# Altium PCB AMPURR.PcbDoc (part 6 of 6)
Units mm, origin at the board's own origin, x right, y up, seen from the top; angles counter-clockwise.
Board outline 100 x 100 mm, 4 copper layers (Top Layer, GND, VDD, Bottom Layer), stack 1.586 mm thick; 522 components, 281 nets, 1527 pads, 2431 vias.
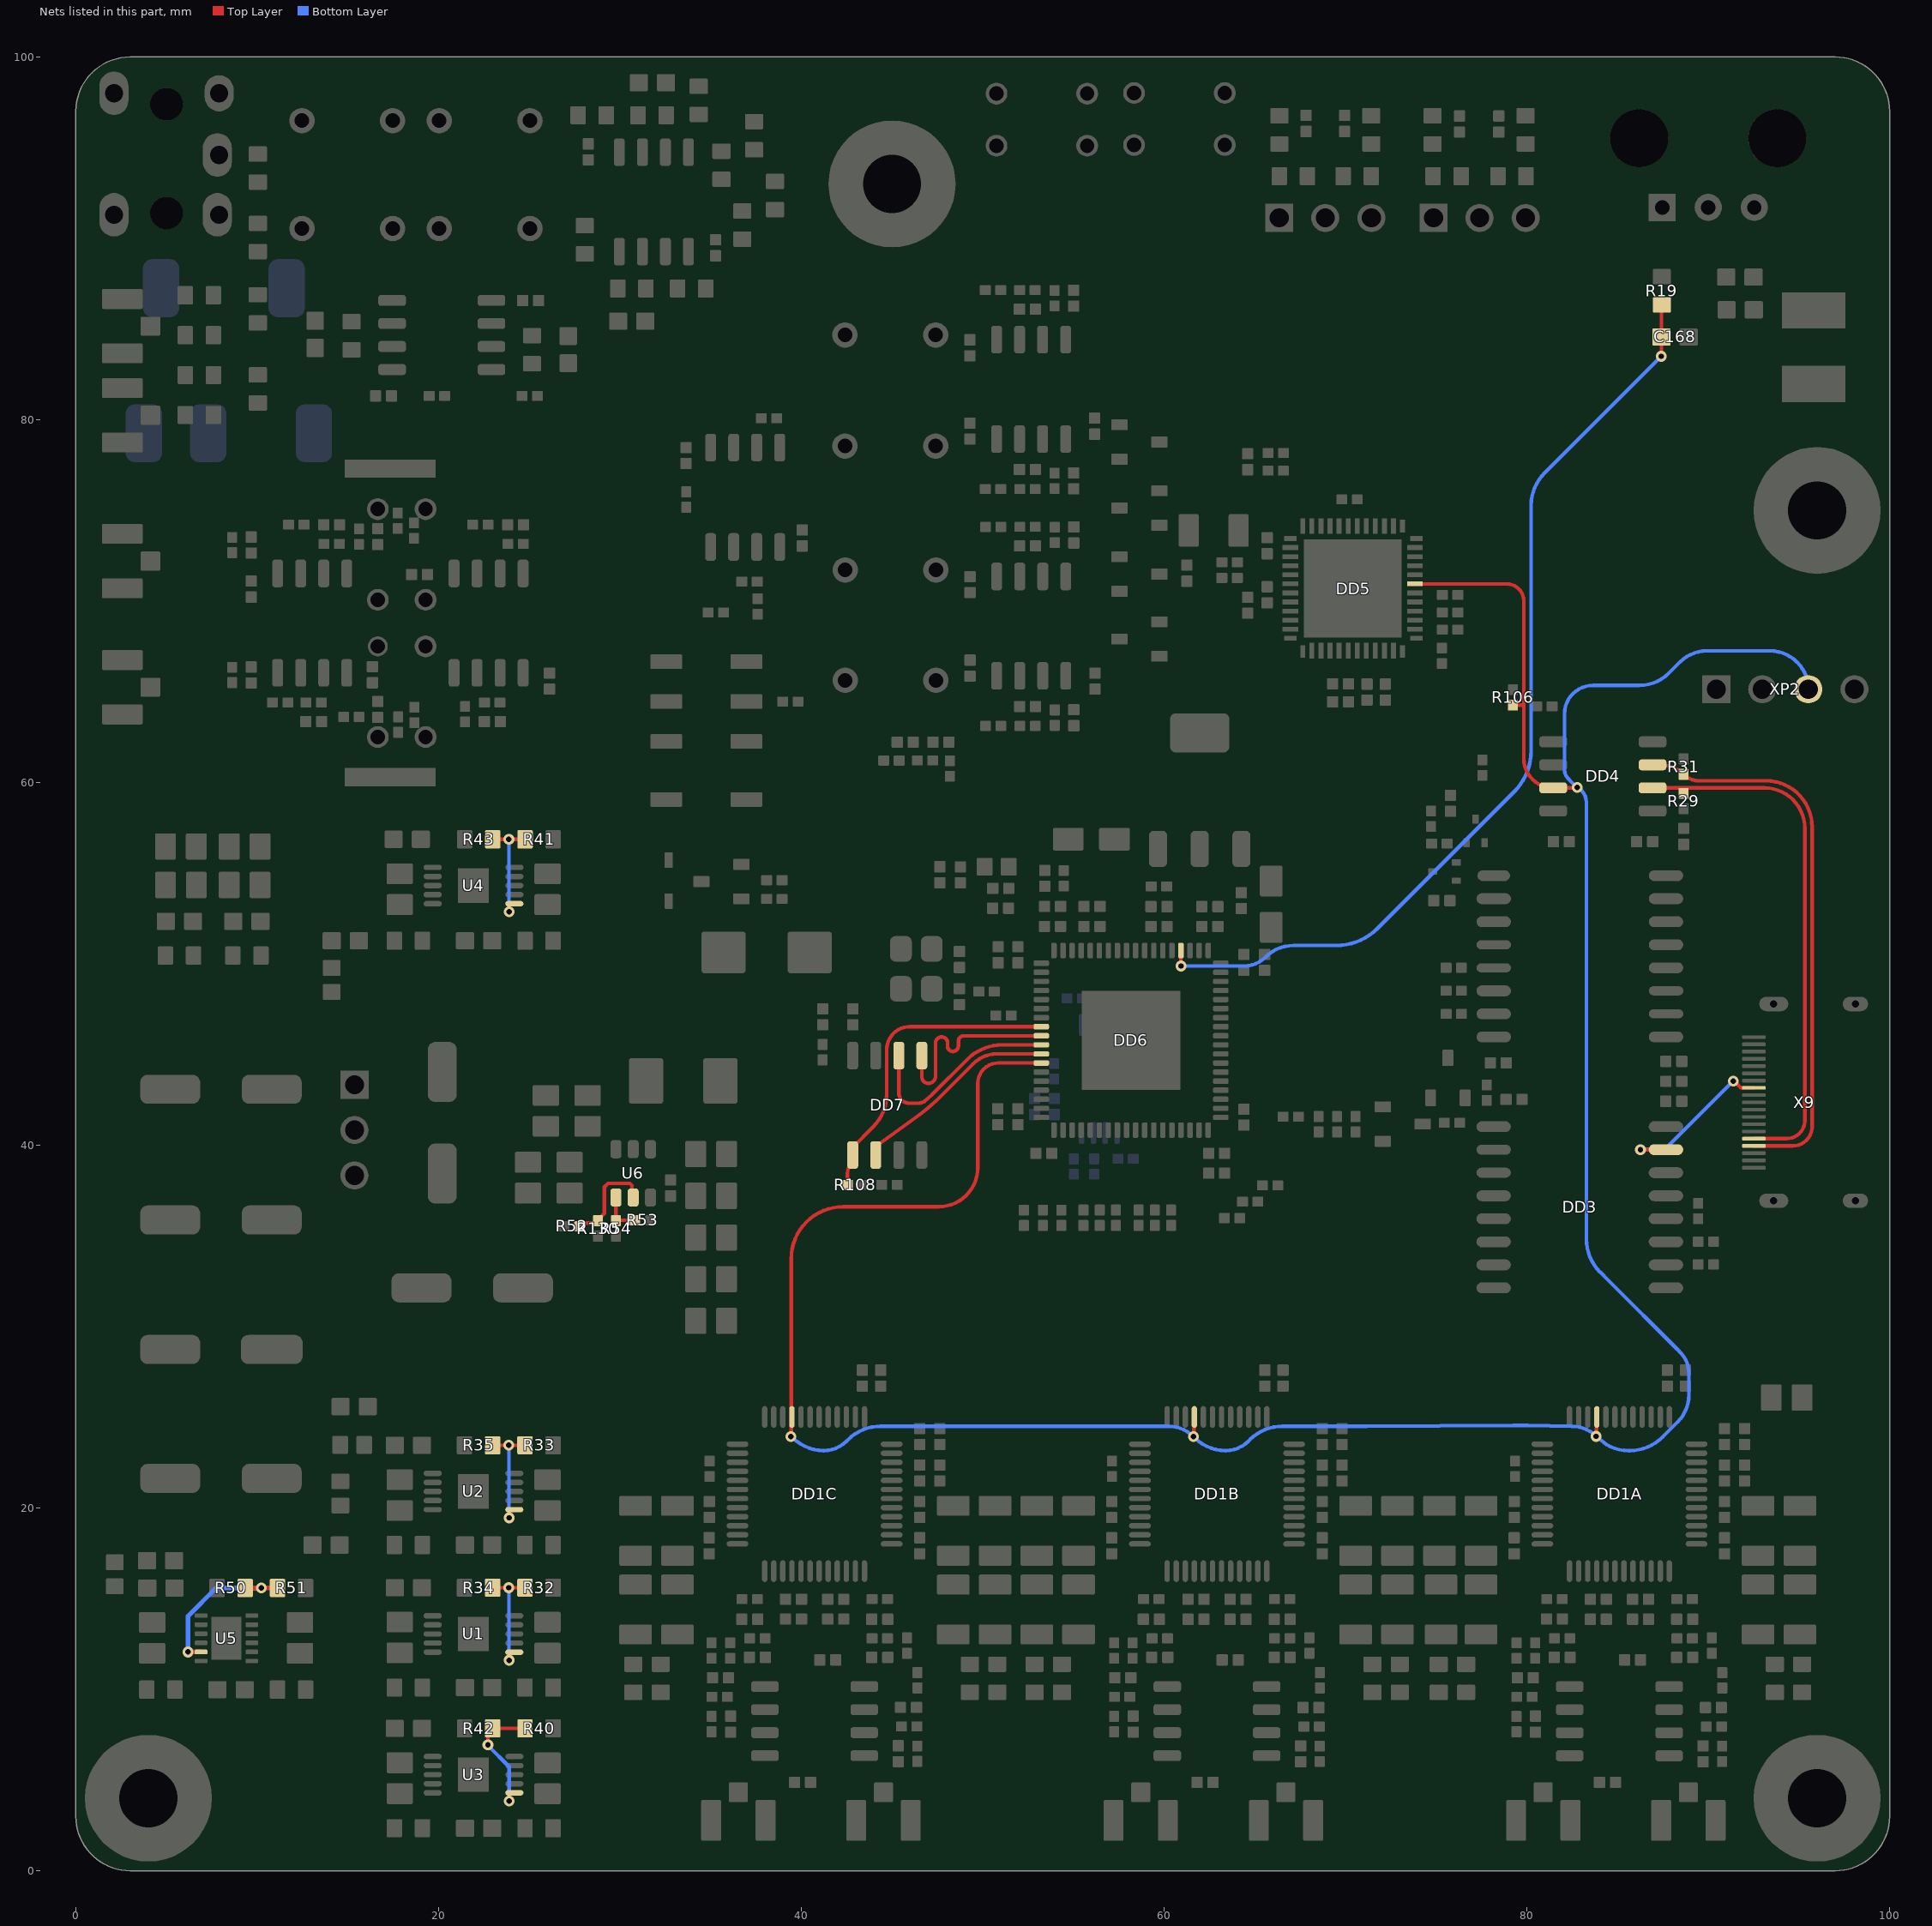
[diagram p7: the nets of this part, all layers, seen from the top]

## Via types
v1: diameter 0.6, hole 0.3, Top Layer to Bottom Layer, tented both sides, 2431 vias

## Nets (pads, with @x,y where several pads share a name; then routed paths per layer and width w, separated by ;. In a path a pad name is that pad's centre, name@x,y a point inside that pad or via, vN(x,y) a via of type N, cw(c..) or ccw(c..) an arc to the next point about the centre after c; other vN are vias at no path point) (continued)
SCL_ISO: DD4.3 R31.2 X9.16 | length 30.4
  Top Layer w0.2: DD4.3@87.38,60.972 cw(c87.38,59.183) R31.2@88.645,60.448 ccw(c89.505,61.308) 89.505,60.092 93.187,60.092 cw(c93.187,57.552) 95.727,57.552 95.727,41.021 cw(c94.668,41.021) 94.668,39.962 94.561,39.961 X9.16@92.496,39.961
SDA: DD1A.9 DD1B.9 DD1C.9 DD4.7 DD5.31 DD6.30 R106.2 XP2.3 | length 162.5
  Top Layer w0.2: v1(39.418,23.935) ccw(c39.367,23.987) 39.44,23.987 39.44,33.74 cw(c42.308,33.74) 42.308,36.609 47.571,36.609 ccw(c47.571,38.769) 49.497,37.79 ccw(c47.509,38.783) 49.731,38.783 49.731,43.409 cw(c50.856,43.409) 50.856,44.534 DD6.30@53.229,44.534 ; v1(61.619,23.936) 61.668,24.569 DD1B.9@61.668,25.019 ; DD5.31@73.833,70.95 75.074,70.95 75.076,70.948 77.239,70.948 78.896,70.948 cw(c78.896,70.016) 79.828,70.016 79.828,64.267 ; R106.2@79.235,64.264 79.826,64.264 79.828,64.267 ; v1(82.772,59.726) cw(c82.716,59.782) 82.716,59.703 DD4.7@81.455,59.703 cw(c81.455,61.329) 79.828,61.329 79.828,64.267 ; v1(83.821,23.951) 83.856,24.569 DD1A.9@83.856,25.019
  Bottom Layer w0.2: v1(39.418,23.935) 39.461,23.935 39.527,23.87 ccw(c41.236,25.579) 41.235,23.162 ; 41.236,23.162 ccw(c41.236,24.937) 42.492,23.682 42.574,23.765 cw(c44.37,21.969) 44.37,24.509 60.237,24.509 cw(c60.237,22.553) v1(61.619,23.936) ; v1@61.684,23.87 ccw(c63.394,25.579) 63.393,23.162 ; 63.394,23.162 ccw(c63.394,24.937) 64.649,23.682 64.733,23.765 cw(c66.529,21.969) 66.529,24.509 71.169,24.509 79.252,24.547 80.047,24.547 82.473,24.509 cw(c82.473,22.603) v1(83.821,23.951) 84.368,23.507 ccw(c85.612,25.579) 85.611,23.162 85.682,23.162 ccw(c85.682,25.702) 87.478,23.906 88.303,24.731 ccw(c86.777,26.26) 88.937,26.26 88.937,27.418 ccw(c87.308,27.418) 88.657,28.331 88.5,28.529 ccw(c87.308,27.418) 88.461,28.569 cw(c88.728,28.839) 88.438,28.595 ; v1(82.772,59.726) 82.366,60.123 cw(c82.772,60.538) 82.341,60.15 82.279,60.218 ccw(c82.131,60.084) 82.273,60.225 cw(c82.74,60.693) 82.079,60.693 82.079,63.784 cw(c83.647,63.784) 83.647,65.352 86.207,65.352 ccw(c86.207,67.647) 87.83,66.024 88.446,66.64 cw(c89.932,65.154) 89.932,67.255 93.406,67.255 cw(c93.406,65.14) XP2.3@95.521,65.14 ; v1@82.923,59.668 cw(c81.85,58.595) 83.213,59.261 ; 83.213,59.26 cw(c83.033,59.173) 83.227,59.225 cw(c81.378,58.739) 83.289,58.744 83.289,34.808 ccw(c85.829,34.808) 84.033,33.012 84.514,32.531 88.309,28.736 cw(c86.777,27.213) 88.436,28.597 ccw(c88.728,28.839) 88.437,28.595
SDA_ISO: DD4.2 R29.2 X9.15 | length 29.2
  Top Layer w0.2: DD4.2@86.935,59.702 86.938,59.706 93.091,59.706 cw(c93.091,57.47) 95.327,57.47 95.327,41.366 cw(c94.324,41.366) 94.324,40.363 X9.15@92.517,40.363
SPDIFIN: C168.2 DD6.4 R19.2 | length 52.9
  Top Layer w0.2: v1(60.927,49.879) 60.927,50.732 DD6.4@60.929,50.734 ; v1(87.409,83.5) 87.42,83.5 C168.2@87.42,84.562 87.42,86.337 R19.2@87.442,86.337
  Bottom Layer w0.2: v1(60.927,49.879) 64.394,49.879 ccw(c64.394,51.587) 65.602,50.379 cw(c67.131,48.85) 67.131,51.013 69.496,51.013 ccw(c69.496,54.216) 71.761,51.951 79.301,59.491 ccw(c77.036,61.756) 80.239,61.756 80.239,75.277 cw(c82.779,75.277) 80.983,77.074 v1(87.409,83.5)
SPI_MISO_M: DD6.29 DD7.2 | length 10.8
  Top Layer w0.2: DD7.2@44.241,40.025 46.556,41.724 46.996,42.064 ; 46.994,42.065 47.463,42.484 49.473,44.494 cw(c50.775,43.192) 50.777,45.034 ; 50.778,45.034 DD6.29@53.229,45.034
SPI_MOSI_M: DD6.27 DD7.5 | length 11.4
  Top Layer w0.2: DD7.5@46.643,44.943 46.643,43.772 ccw(c47.007,43.772) 47.007,43.408 ccw(c47.007,43.8) 47.399,43.8 47.399,45.632 cw(c47.738,45.632) 47.738,45.97 cw(c47.738,45.646) 48.062,45.646 48.062,45.458 ccw(c48.35,45.458) 48.35,45.17 ccw(c48.35,45.48) 48.659,45.48 48.659,45.735 cw(c48.958,45.735) 48.958,46.034 DD6.27@53.229,46.034
SPI_SCLK_M: DD6.28 DD7.6 | length 11.4
  Top Layer w0.2: 45.373,43.029 45.373,42.882 ccw(c45.934,42.882) 45.934,42.321 46.441,42.321 ccw(c46.441,43.03) 46.746,42.391 ccw(c46.659,42.571) 46.793,42.422 47.184,42.771 ccw(c47.05,42.92) 47.191,42.778 49.19,44.777 cw(c50.775,43.192) 49.788,45.205 49.925,45.272 cw(c51.048,42.994) 51.048,45.534 DD6.28@53.229,45.534 ; 45.373,43.03 DD7.6@45.373,44.943
SPI_SS_M: DD6.26 DD7.1 R108.2 | length 16.9
  Top Layer w0.2: R108.2@42.539,37.822 42.539,38.446 cw(c43.24,38.446) DD7.1@42.744,38.942 ; DD7.1@42.833,39.463 42.833,39.888 43.961,41.016 ccw(c42.165,42.812) 44.705,42.812 44.705,45.251 cw(c46.005,45.251) 45.085,46.169 ; 45.086,46.17 cw(c45.964,45.291) 45.964,46.534 DD6.26@53.229,46.534
Vfb=0.595V: R53.1 R54.1 U6.4 | length 2.4
  Top Layer w0.2: U6.4@29.78,37.224 29.78,35.866 R53.1@30.78,35.866
xCLIPPING: DD3.15 X9.8 | length 9.4
  Top Layer w0.2: v1@86.264,39.754 DD3.15@87.671,39.754 ; v1(91.38,43.538) 91.593,43.37 91.779,43.184 91.819,43.182 X9.8@92.517,43.163
  Bottom Layer w0.2: v1(86.264,39.752) 87.594,39.752 v1(91.38,43.538)
~2V: R52.1 R130.2 U6.5 | length 5.4
  Top Layer w0.2: R52.1@27.761,35.533 27.934,35.706 28.655,35.706 R130.2@28.786,35.837 28.961,36.012 28.961,36.065 29.137,36.24 29.137,37.693 29.343,37.899 30.539,37.899 30.656,37.782 30.656,37.298 U6.5@30.73,37.224
~3V: R33.1 R35.2 U2.6 | length 6.5
  Top Layer w0.2: R35.2@22.98,23.458 v1(23.872,23.458) R33.1@24.763,23.458 ; v1(23.886,19.46) 23.905,19.48 23.905,19.862 24.128,19.862 U2.6@24.174,19.908
  Bottom Layer w0.2: v1(23.872,23.458) 23.879,23.451 23.879,19.467 v1(23.886,19.46)
~4V6: R32.1 R34.2 U1.6 | length 6.5
  Top Layer w0.2: R34.2@22.98,15.602 v1(23.872,15.602) R32.1@24.763,15.602 ; v1(23.886,11.605) 23.905,11.624 23.905,12.006 24.128,12.006 U1.6@24.174,12.052
  Bottom Layer w0.2: v1(23.872,15.602) 23.879,15.595 23.879,11.612 v1(23.886,11.605)
~4V6_: R41.1 R43.2 U4.6 | length 6.5
  Top Layer w0.2: R43.2@22.982,56.868 v1(23.873,56.868) R41.1@24.765,56.868 ; v1(23.888,52.871) 23.907,52.89 23.907,53.272 24.13,53.272 U4.6@24.176,53.318
  Bottom Layer w0.2: v1(23.873,56.868) 23.881,56.861 23.881,52.878 v1(23.888,52.871)
~+10V: R40.2 R42.1 U3.6 | length 7.1
  Top Layer w0.2: v1@22.722,6.897 22.722,7.585 R42.1@22.982,7.845 R40.2@24.765,7.845 ; v1(23.888,3.848) 23.907,3.867 23.907,4.249 24.13,4.249 U3.6@24.176,4.295 U3.6@24.148,4.267
  Bottom Layer w0.2: v1@22.722,6.897 23.888,5.731 v1(23.888,3.848)
  other v1: 22.722,6.934
~-10V: R50.2 R51.1 U5.5 | length 9.2
  Top Layer w0.25: v1(6.179,12.062) 6.18,12.064 U5.5@6.902,12.064 ; R50.2@9.333,15.59 R51.1@11.116,15.59
  Bottom Layer w0.25: v1(6.179,12.062) 6.179,14.029 7.74,15.59 v1(10.224,15.59)
pads on no net: DA2.MH DD1A.10 DD1A.11 DD1B.10 DD1B.11 DD1C.10 DD1C.11 DD2.5 DD2.12 DD3.3 DD3.4 DD3.13 DD3.14 DD5.29 DD6.5 DD6.8 DD6.9 DD6.10 DD6.11 DD6.12 DD6.13 DD6.46 DD6.63 DD6.64 U1.4 U2.4 U3.4 U4.4 U5.4 U5.7 X1.5 X3.0

## Polygon pours and split planes (outlines as drawn)
GND on Top Layer "NONET_L-01_P-001" (solid, remove dead copper, pour order 99): 0,-0.023 0,100 100,100 100,63.701 85.32,63.701 85.32,31.421 90.639,31.421 92.771,29.289 100,29.289 100,0.113
GND_ISO on Top Layer "NONET_L-01_P-001" (solid, remove dead copper, pour order 63): 85.544,63.52 100.005,63.52 100.005,29.388 92.824,29.388 90.616,31.595 86.492,31.595 85.544,32.544
GND on VDD "NONET_L-01_P-001" (solid, remove dead copper, pour order 100): 0,-0.023 0,100 100,100 100,63.701 85.32,63.701 85.32,31.421 90.639,31.421 92.771,29.289 100,29.289 100,0.113
+5VAK on VDD "NONET_L-01_P-001" (solid, remove dead copper, pour order 98): 64.349,75.183 64.349,70.285 60.157,66.093 59.437,66.093 59.438,68.962 59.437,75.183
+3.3VD on VDD "NONET_L-01_P-001" (solid, remove dead copper, pour order 89): 39.613,51.225 35.27,51.225 34.667,50.622 34.667,24.282 92.326,24.282 92.326,26.97 37.576,26.97 37.576,45.416 48.696,56.536 75.873,56.536 80.585,56.536 80.585,64.284 80.891,64.59 90.932,64.59 90.932,65.913 79.062,65.913 78.309,65.161 78.309,62.142 74.401,58.873 67.829,58.873 67.829,63.496 69.579,63.496 69.579,64.693 65.844,64.693 65.844,59.268 56.506,59.268 55.134,59.268 54.646,58.78 47.179,58.78
+5VA on VDD "NONET_L-01_P-001" (solid, remove dead copper, pour order 78): 32.749,11.251 29.946,11.251 29.684,11.513 29.684,12.581 28.044,14.221 26.99,13.234 28.328,11.895 28.328,9.57 29.653,8.245 33.358,8.245 36.627,11.513 43.148,11.513 43.148,14.667 36.164,14.667
+3.3VA on VDD "NONET_L-01_P-001" (solid, remove dead copper, pour order 83): 27.243,22.157 27.098,21.017 28.786,19.329 93.012,19.329 93.012,21.802 89.133,21.802 88.55,21.218 88.003,21.218 87.727,21.494 83.522,21.494 83.123,21.893 66.932,21.893 66.257,21.218 65.88,21.218 65.604,21.494 61.508,21.494 61.109,21.893 44.801,21.893 44.126,21.218 43.659,21.218 43.367,21.51 39.387,21.51 38.74,22.157
+5VA on VDD "NONET_L-01_P-001" (solid, remove dead copper, pour order 72): 93.481,11.135 96.326,11.135 96.326,8.29 92.403,8.29 89.176,11.517 82.682,11.517 82.682,14.709 89.907,14.709
+5VA on VDD "NONET_L-01_P-001" (solid, remove dead copper, pour order 75): 71.235,11.157 74.134,11.157 74.134,8.258 70.395,8.258 67.106,11.547 60.49,11.547 60.49,14.666 67.726,14.666
+5VA on VDD "NONET_L-01_P-001" (solid, remove dead copper, pour order 73): 77.055,11.155 73.884,11.155 73.884,8.252 77.768,8.252 81.033,11.516 87.528,11.516 87.528,14.709 80.609,14.709
+5VA on VDD "NONET_L-01_P-001" (solid, remove dead copper, pour order 74): 54.843,11.157 51.692,11.157 51.692,8.249 55.551,8.249 58.854,11.552 65.336,11.552 65.336,14.674 58.359,14.674
+5VA on VDD "NONET_L-01_P-001" (solid, remove dead copper, pour order 76): 49.037,11.157 51.946,11.157 51.946,8.249 48.23,8.249 44.958,11.52 38.302,11.52 38.302,14.667 45.528,14.667
GND_ISO on VDD "NONET_L-01_P-001" (solid, remove dead copper, pour order 38): 85.552,63.605 100.005,63.605 100.005,29.388 92.824,29.388 90.61,31.602 86.486,31.602 85.552,32.536
MVCC on VDD "NONET_L-01_P-001" (solid, remove dead copper, pour order 15): 64.562,54.906 64.562,53.916 62.629,51.983 62.629,50.368 54.007,50.368 51.776,48.137 51.776,47.129 52.892,46.014 52.892,40.999 53.416,40.476 53.416,39.988 51.722,39.988 51.722,45.086 50.488,46.32 50.488,48.754 51.341,49.607 51.341,54.906
GND on Bottom Layer "NONET_L-01_P-001" (solid, remove dead copper, pour order 70): 0,-0.023 0,100 99.831,100 99.918,63.755 85.418,63.755 85.418,32.488 86.485,31.421 90.639,31.421 92.771,29.289 100,29.289 100,0.113
GND_ISO on Bottom Layer "NONET_L-01_P-001" (solid, remove dead copper, pour order 37): 85.576,63.565 100.005,63.565 100.005,29.388 92.824,29.388 90.613,31.598 86.538,31.598 85.576,32.56
GND on GND "NONET_L-01_P-001" (solid, remove dead copper, pour order 68): 0,-0.023 0,100 99.831,100 99.918,63.79 85.418,63.79 85.418,32.439 86.423,31.434 90.627,31.434 92.771,29.289 100,29.289 100,0.113
GND_ISO on GND "NONET_L-01_P-001" (solid, remove dead copper, pour order 59): 85.544,63.599 100.005,63.599 100.005,29.388 92.824,29.388 90.612,31.6 86.454,31.6 85.544,32.509

## Keep-outs
Top Layer:
  circle w0.254: c86.19,95.516 r2.091
  circle w0.254: c93.81,95.516 r2.091
  lines w0.1: 48.824,91.652 59.829,91.652 62.886,88.595 82.388,88.595 82.388,99.521
GND:
  circle w0.254: c93.81,95.516 r2.091
  circle w0.254: c86.2,95.427 r2.091
  circle w0.254: c93.82,95.427 r2.091
  lines w0.1: 48.824,91.652 59.829,91.652 62.886,88.595 82.388,88.595 82.388,99.521
VDD:
  circle w0.254: c86.19,95.516 r2.091
  circle w0.254: c93.81,95.516 r2.091
  lines w0.1: 48.824,91.652 59.829,91.652 62.886,88.595 82.388,88.595 82.388,99.521
Bottom Layer:
  circle w0.254: c93.81,95.516 r2.091
  circle w0.254: c86.19,95.516 r2.091
  lines w0.1: 48.824,91.652 59.829,91.652 62.886,88.595 82.388,88.595 82.388,99.521

## Other copper
Top Layer:
  drawing of 205 lines, arcs and shapes, not listed
GND:
  region net -12V0: 11.723,35.884 11.732,35.875 cw(c11.442,35.875) 11.442,35.585 10.793,35.585 cw(c10.793,35.875) 10.503,35.875 cw(c10.802,35.875) 10.802,36.174 11.45,36.174 cw(c11.442,35.884) 11.732,35.875
  region net -12VOP: 13.985,14.286 cw(c13.985,13.983) 14.287,13.983 14.287,13.393 cw(c13.974,13.393) 13.974,13.08 13.415,13.08 cw(c13.415,13.403) 13.091,13.403 13.091,13.978 cw(c13.399,13.978) 13.399,14.286
  region net NetC67_1: 7.795,13.613 8.805,13.613 cw(c8.805,13.312) 9.106,13.312 9.106,12.307 cw(c8.808,12.307) 8.808,12.009 7.797,12.009 cw(c7.797,12.294) 7.512,12.294 7.512,13.333 cw(c7.79,13.333) 7.79,13.611
  region net +3.3VA: 27.838,22.157 cw(c27.838,21.855) 28.141,21.855 28.141,21.264 cw(c27.828,21.264) 27.828,20.951 27.268,20.951 cw(c27.268,21.275) 26.945,21.275 26.945,21.85 cw(c27.253,21.85) 27.253,22.157
  region net +5VA: 27.833,14.302 cw(c27.833,13.999) 28.136,13.999 28.136,13.408 cw(c27.823,13.408) 27.823,13.095 27.264,13.095 cw(c27.264,13.419) 26.94,13.419 26.94,13.994 cw(c27.248,13.994) 27.248,14.302
  region net +5VAK: 63.349,74.79 63.658,74.788 cw(c63.658,74.491) 63.955,74.491 63.955,73.31 cw(c63.646,73.31) 63.646,73.001 63.353,73.001 cw(c63.353,73.31) 63.044,73.31 63.044,74.491 cw(c63.341,74.491) 63.341,74.788
  region net -12VOP: 8.823,49.67 cw(c8.619,49.461) 8.828,49.256 8.218,48.646 cw(c8.002,48.855) 7.793,48.639 cw(c8.009,48.855) 7.793,49.071 8.391,49.67 cw(c8.607,49.454)
  region net +12VOP: 6.741,49.457 cw(c6.449,49.454) 6.452,49.161 5.813,49.161 cw(c5.813,49.457) 5.517,49.457 cw(c5.818,49.461) 5.814,49.762 6.436,49.762 cw(c6.436,49.457)
  region net +12VOPF: 4.969,58.547 cw(c4.973,58.254) 5.265,58.257 5.265,57.511 cw(c4.979,57.511) 4.979,57.224 cw(c4.979,57.539) 4.664,57.539 4.664,58.241 cw(c4.969,58.241)
  region net -12VOPF: 10.198,59.082 ccw(c10.198,58.784) 9.9,58.784 9.9,58.776 ccw(c10.198,58.776) 10.198,58.478 11.033,58.478 ccw(c11.033,58.784) 11.339,58.784 ccw(c11.041,58.785) 11.041,59.082
  region net +5VAK: 27.868,55.548 cw(c27.868,55.266) 28.15,55.266 28.15,54.636 cw(c27.866,54.636) 27.866,54.351 27.258,54.351 cw(c27.258,54.664) 26.945,54.664 26.945,55.249 cw(c27.245,55.249) 27.245,55.548
  region net +3.3VD: 48.318,57.748 cw(c48.318,57.445) 48.621,57.445 48.621,56.855 cw(c48.308,56.855) 48.308,56.541 47.748,56.541 cw(c47.748,56.865) 47.425,56.865 47.425,57.44 cw(c47.733,57.44) 47.733,57.748
  region net +3.3VD: 36.02,51.224 cw(c36.02,50.916) 36.328,50.916 36.328,50.309 cw(c36.037,50.309) 36.037,50.017 35.423,50.017 cw(c35.423,50.314) 35.127,50.314 35.127,50.927 cw(c35.423,50.927) 35.423,51.224
  region net +3.3VD: 92.322,25.79 92.322,26.389 ccw(c92.017,26.389) 92.017,26.694 ccw(c92.017,26.394) 91.717,26.394 91.717,25.799 ccw(c92.015,25.799) 92.015,25.501 92.036,25.501 ccw(c92.036,25.786) 92.32,25.786
  region net +3.3VD: 36.185,29.551 cw(c36.185,29.248) 36.488,29.248 36.488,28.657 cw(c36.175,28.657) 36.175,28.344 35.615,28.344 cw(c35.615,28.668) 35.292,28.668 35.292,29.243 cw(c35.6,29.243) 35.6,29.551
  region net NetC23C_2: 32.522,14.701 33.804,14.701 cw(c33.804,14.399) 34.105,14.399 cw(c33.804,14.399) 33.804,14.098 32.539,14.097 cw(c32.539,14.406) 32.23,14.406 32.23,14.409 cw(c32.53,14.4) 32.539,14.701
  region net NetC23C_2: 32.522,19.046 33.804,19.046 cw(c33.804,18.744) 34.105,18.744 cw(c33.804,18.744) 33.804,18.443 32.539,18.442 cw(c32.539,18.751) 32.23,18.751 32.23,18.754 cw(c32.53,18.745) 32.539,19.046
  region net NetC3C_2: 47.723,14.701 49.005,14.701 cw(c49.005,14.399) 49.307,14.399 cw(c49.005,14.399) 49.005,14.098 47.74,14.097 cw(c47.74,14.406) 47.431,14.406 47.431,14.409 cw(c47.732,14.4) 47.74,14.701
  region net NetC3C_2: 47.727,19.046 49.009,19.046 cw(c49.009,18.744) 49.31,18.744 cw(c49.009,18.744) 49.009,18.443 47.744,18.442 cw(c47.744,18.751) 47.435,18.751 47.435,18.754 cw(c47.735,18.745) 47.744,19.046
  region net NetC26C_1: 30.414,12.294 31.064,12.294 cw(c31.064,12) 31.358,12 cw(c31.057,11.992) 31.064,11.691 30.431,11.691 cw(c30.431,12) 30.122,12 30.122,12.002 cw(c30.422,11.994) 30.431,12.294
  region net NetC26C_1: 30.215,14.701 31.497,14.701 cw(c31.497,14.399) 31.798,14.399 cw(c31.497,14.399) 31.497,14.098 30.232,14.097 cw(c30.232,14.406) 29.923,14.406 29.923,14.409 cw(c30.223,14.4) 30.232,14.701
  region net NetC26C_1: 30.215,19.046 31.497,19.046 cw(c31.497,18.744) 31.798,18.744 cw(c31.497,18.744) 31.497,18.443 30.232,18.442 cw(c30.232,18.751) 29.923,18.751 29.923,18.754 cw(c30.223,18.745) 30.232,19.046
  region net NetC3C_1: 50.029,14.701 51.311,14.701 cw(c51.311,14.399) 51.613,14.399 cw(c51.311,14.399) 51.311,14.098 50.046,14.097 cw(c50.046,14.406) 49.737,14.406 49.737,14.409 cw(c50.038,14.4) 50.046,14.701
  region net NetC3C_1: 50.475,12.294 51.125,12.294 cw(c51.125,12) 51.419,12 cw(c51.118,11.992) 51.125,11.691 50.492,11.691 cw(c50.492,12) 50.183,12 50.183,12.002 cw(c50.483,11.994) 50.492,12.294
  region net NetC3C_1: 50.029,19.046 51.311,19.046 cw(c51.311,18.744) 51.613,18.744 cw(c51.311,18.744) 51.311,18.443 50.046,18.442 cw(c50.046,18.751) 49.737,18.751 49.737,18.754 cw(c50.038,18.745) 50.046,19.046
  region net NetC3C_1: 50.029,19.046 51.311,19.046 cw(c51.311,18.744) 51.613,18.744 cw(c51.311,18.744) 51.311,18.443 50.046,18.442 cw(c50.046,18.751) 49.737,18.751 49.737,18.754 cw(c50.038,18.745) 50.046,19.046
  region net MVCC: 52.109,54.06 52.736,54.061 cw(c52.732,53.76) 53.032,53.756 53.032,53.135 cw(c52.736,53.135) 52.736,52.838 52.109,52.838 cw(c52.109,53.136) 51.811,53.136 51.811,53.762 cw(c52.108,53.762) 52.108,54.059
  region net MVCC: 63.607,54.889 64.257,54.889 cw(c64.257,54.595) 64.551,54.595 cw(c64.25,54.587) 64.257,54.286 63.624,54.286 cw(c63.624,54.595) 63.315,54.595 63.315,54.598 cw(c63.615,54.589) 63.624,54.889
  region net +12VOP: 27.834,6.545 cw(c27.834,6.242) 28.137,6.242 28.137,5.652 cw(c27.824,5.652) 27.824,5.338 27.265,5.338 cw(c27.265,5.662) 26.941,5.662 26.941,6.237 cw(c27.249,6.237) 27.249,6.545
  region net NetC3A_1: 94.405,19.046 95.687,19.046 cw(c95.687,18.744) 95.989,18.744 cw(c95.687,18.744) 95.687,18.443 94.422,18.442 cw(c94.422,18.751) 94.113,18.751 94.113,18.754 cw(c94.414,18.745) 94.422,19.046
  region net NetC3A_2: 92.103,19.046 93.385,19.046 cw(c93.385,18.744) 93.686,18.744 cw(c93.385,18.744) 93.385,18.443 92.12,18.442 cw(c92.12,18.751) 91.811,18.751 91.811,18.754 cw(c92.111,18.745) 92.12,19.046
  region net NetC3A_1: 94.405,14.701 95.687,14.701 cw(c95.687,14.399) 95.989,14.399 cw(c95.687,14.399) 95.687,14.098 94.422,14.097 cw(c94.422,14.406) 94.113,14.406 94.113,14.409 cw(c94.414,14.4) 94.422,14.701
  region net NetC3A_2: 92.099,14.701 93.381,14.701 cw(c93.381,14.399) 93.683,14.399 cw(c93.381,14.399) 93.381,14.098 92.116,14.097 cw(c92.116,14.406) 91.807,14.406 91.807,14.409 cw(c92.108,14.4) 92.116,14.701
  region net NetC3A_1: 94.851,12.294 95.501,12.294 cw(c95.501,12) 95.795,12 cw(c95.494,11.992) 95.501,11.691 94.868,11.691 cw(c94.868,12) 94.559,12 94.559,12.002 cw(c94.859,11.994) 94.868,12.294
  region net NetC23A_2: 76.827,14.701 78.109,14.701 cw(c78.109,14.399) 78.41,14.399 cw(c78.109,14.399) 78.109,14.098 76.844,14.097 cw(c76.844,14.406) 76.535,14.406 76.535,14.409 cw(c76.835,14.4) 76.844,14.701
  region net NetC23A_2: 76.827,19.046 78.109,19.046 cw(c78.109,18.744) 78.41,18.744 cw(c78.109,18.744) 78.109,18.443 76.844,18.442 cw(c76.844,18.751) 76.535,18.751 76.535,18.754 cw(c76.835,18.745) 76.844,19.046
  region net NetC26A_1: 74.534,19.046 75.816,19.046 cw(c75.816,18.744) 76.117,18.744 cw(c75.816,18.744) 75.816,18.443 74.551,18.442 cw(c74.551,18.751) 74.242,18.751 74.242,18.754 cw(c74.542,18.745) 74.551,19.046
  region net NetC26A_1: 74.534,14.701 75.816,14.701 cw(c75.816,14.399) 76.117,14.399 cw(c75.816,14.399) 75.816,14.098 74.551,14.097 cw(c74.551,14.406) 74.242,14.406 74.242,14.409 cw(c74.542,14.4) 74.551,14.701
  region net NetC3B_1: 72.217,14.701 73.499,14.701 cw(c73.499,14.399) 73.801,14.399 cw(c73.499,14.399) 73.499,14.098 72.234,14.097 cw(c72.234,14.406) 71.925,14.406 71.925,14.409 cw(c72.226,14.4) 72.234,14.701
  region net NetC3B_1: 72.217,19.046 73.499,19.046 cw(c73.499,18.744) 73.801,18.744 cw(c73.499,18.744) 73.499,18.443 72.234,18.442 cw(c72.234,18.751) 71.925,18.751 71.925,18.754 cw(c72.226,18.745) 72.234,19.046
  region net NetC3B_2: 69.915,19.046 71.197,19.046 cw(c71.197,18.744) 71.498,18.744 cw(c71.197,18.744) 71.197,18.443 69.932,18.442 cw(c69.932,18.751) 69.623,18.751 69.623,18.754 cw(c69.923,18.745) 69.932,19.046
  region net NetC3B_2: 69.911,14.701 71.193,14.701 cw(c71.193,14.399) 71.495,14.399 cw(c71.193,14.399) 71.193,14.098 69.928,14.097 cw(c69.928,14.406) 69.619,14.406 69.619,14.409 cw(c69.92,14.4) 69.928,14.701
  region net NetC3B_1: 72.663,12.294 73.313,12.294 cw(c73.313,12) 73.607,12 cw(c73.306,11.992) 73.313,11.691 72.68,11.691 cw(c72.68,12) 72.371,12 72.371,12.002 cw(c72.671,11.994) 72.68,12.294
  region net NetC26A_1: 74.79,12.294 75.44,12.294 cw(c75.44,12) 75.734,12 cw(c75.433,11.992) 75.44,11.691 74.807,11.691 cw(c74.807,12) 74.498,12 74.498,12.002 cw(c74.799,11.994) 74.807,12.294
  region net NetC26B_1: 52.342,19.046 53.625,19.046 cw(c53.625,18.744) 53.926,18.744 cw(c53.625,18.744) 53.625,18.443 52.36,18.442 cw(c52.36,18.751) 52.051,18.751 52.051,18.754 cw(c52.351,18.745) 52.36,19.046
  region net NetC23B_2: 54.645,19.046 55.927,19.046 cw(c55.927,18.744) 56.228,18.744 cw(c55.927,18.744) 55.927,18.443 54.662,18.442 cw(c54.662,18.751) 54.353,18.751 54.353,18.754 cw(c54.653,18.745) 54.662,19.046
  region net NetC26B_1: 52.537,12.294 53.187,12.294 cw(c53.187,12) 53.481,12 cw(c53.18,11.992) 53.187,11.691 52.554,11.691 cw(c52.554,12) 52.245,12 52.245,12.002 cw(c52.545,11.994) 52.554,12.294
  region net NetC23B_2: 54.648,14.701 55.931,14.701 cw(c55.931,14.399) 56.232,14.399 cw(c55.931,14.399) 55.931,14.098 54.666,14.097 cw(c54.666,14.406) 54.357,14.406 54.357,14.409 cw(c54.657,14.4) 54.666,14.701
  region net NetC26B_1: 52.342,14.701 53.625,14.701 cw(c53.625,14.399) 53.926,14.399 cw(c53.625,14.399) 53.625,14.098 52.36,14.097 cw(c52.36,14.406) 52.051,14.406 52.051,14.409 cw(c52.351,14.4) 52.36,14.701
VDD:
  region net -12V0: 11.723,35.884 11.732,35.875 cw(c11.442,35.875) 11.442,35.585 10.793,35.585 cw(c10.793,35.875) 10.503,35.875 cw(c10.802,35.875) 10.802,36.174 11.45,36.174 cw(c11.442,35.884) 11.732,35.875
  region net -12VOP: 13.983,14.285 cw(c13.983,13.982) 14.286,13.982 14.286,13.392 cw(c13.973,13.392) 13.973,13.079 13.413,13.079 cw(c13.413,13.402) 13.09,13.402 13.09,13.977 cw(c13.398,13.977) 13.398,14.285
  region net -12VOP: 13.985,14.286 cw(c13.985,13.983) 14.287,13.983 14.287,13.393 cw(c13.974,13.393) 13.974,13.08 13.415,13.08 cw(c13.415,13.403) 13.091,13.403 13.091,13.978 cw(c13.399,13.978) 13.399,14.286
  region net +3.3VA: 27.846,22.152 cw(c27.846,21.849) 28.149,21.849 28.149,21.259 cw(c27.835,21.259) 27.835,20.946 27.276,20.946 cw(c27.276,21.269) 26.953,21.269 26.953,21.844 cw(c27.261,21.844) 27.261,22.152
  region net +5VA: 27.832,14.3 cw(c27.832,13.998) 28.134,13.998 28.134,13.407 cw(c27.821,13.407) 27.821,13.094 27.262,13.094 cw(c27.262,13.418) 26.939,13.418 26.939,13.993 cw(c27.247,13.993) 27.247,14.3
  region net -12VOP: 8.823,49.67 cw(c8.619,49.461) 8.828,49.256 8.218,48.646 cw(c8.002,48.855) 7.793,48.639 cw(c8.009,48.855) 7.793,49.071 8.391,49.67 cw(c8.607,49.454)
  region net +12VOP: 6.741,49.457 cw(c6.449,49.454) 6.452,49.161 5.813,49.161 cw(c5.813,49.457) 5.517,49.457 cw(c5.818,49.461) 5.814,49.762 6.436,49.762 cw(c6.436,49.457)
  region net +12VOPF: 4.969,58.547 cw(c4.973,58.254) 5.265,58.257 5.265,57.511 cw(c4.979,57.511) 4.979,57.224 cw(c4.979,57.539) 4.664,57.539 4.664,58.241 cw(c4.969,58.241)
  region net -12VOPF: 10.198,59.082 ccw(c10.198,58.784) 9.9,58.784 9.9,58.776 ccw(c10.198,58.776) 10.198,58.478 11.033,58.478 ccw(c11.033,58.784) 11.339,58.784 ccw(c11.041,58.785) 11.041,59.082
  region net +5VAK: 27.868,55.548 cw(c27.868,55.266) 28.15,55.266 28.15,54.636 cw(c27.866,54.636) 27.866,54.351 27.258,54.351 cw(c27.258,54.664) 26.945,54.664 26.945,55.249 cw(c27.245,55.249) 27.245,55.548
  region net NetC23C_2: 32.525,19.046 33.813,19.046 cw(c33.813,18.753) 34.105,18.753 34.105,14.387 cw(c33.813,14.386) 33.813,14.094 32.525,14.094 cw(c32.525,14.387) 32.232,14.387 32.232,18.753 cw(c32.525,18.753)
  region net NetC3C_2: 49.012,19.046 47.724,19.046 ccw(c47.724,18.753) 47.431,18.753 47.431,14.387 ccw(c47.724,14.386) 47.724,14.094 49.012,14.094 ccw(c49.012,14.387) 49.304,14.387 49.304,18.753 ccw(c49.012,18.753)
  region net NetC26C_1: 30.218,19.046 31.506,19.046 cw(c31.506,18.753) 31.798,18.753 31.798,11.979 cw(c31.506,11.979) 31.506,11.686 30.218,11.686 cw(c30.218,11.979) 29.925,11.979 29.925,18.753 cw(c30.218,18.753)
  region net NetC3C_1: 51.319,19.046 50.031,19.046 ccw(c50.031,18.753) 49.738,18.753 49.738,11.979 ccw(c50.031,11.979) 50.031,11.686 51.319,11.686 ccw(c51.319,11.979) 51.611,11.979 51.611,18.753 ccw(c51.319,18.753)
  pour cut-out: 43.894,22.107 ccw(c43.894,21.702) 43.49,21.702 43.49,21.7 ccw(c43.883,21.701) 43.884,21.308 ccw(c43.89,21.707) 44.288,21.7 44.288,21.713 ccw(c43.894,21.713)
  pour cut-out: 66.082,22.107 ccw(c66.082,21.702) 65.678,21.702 65.678,21.7 ccw(c66.071,21.701) 66.072,21.308 ccw(c66.078,21.707) 66.476,21.7 66.476,21.713 ccw(c66.082,21.713)
  pour cut-out: 88.271,22.107 ccw(c88.271,21.702) 87.866,21.702 87.866,21.7 ccw(c88.259,21.701) 88.26,21.308 ccw(c88.266,21.707) 88.665,21.7 88.665,21.713 ccw(c88.271,21.713)
  region net +12VOP: 27.834,6.545 cw(c27.834,6.242) 28.137,6.242 28.137,5.652 cw(c27.824,5.652) 27.824,5.338 27.265,5.338 cw(c27.265,5.662) 26.941,5.662 26.941,6.237 cw(c27.249,6.237) 27.249,6.545
  pour cut-out: 16.649,68.254 16.653,68.254 cw(c16.644,67.506) 17.392,67.496 cw(c16.649,67.496) 16.649,66.753 cw(c16.649,67.498) 15.903,67.498 cw(c16.649,67.508) 16.639,68.254
  pour cut-out: 16.641,70.813 16.645,70.813 cw(c16.636,70.065) 17.384,70.055 cw(c16.641,70.055) 16.641,69.312 cw(c16.641,70.057) 15.895,70.057 cw(c16.641,70.067) 16.631,70.813
  pour cut-out: 19.276,70.813 19.28,70.813 cw(c19.271,70.065) 20.019,70.055 cw(c19.276,70.055) 19.276,69.312 cw(c19.276,70.057) 18.53,70.057 cw(c19.276,70.067) 19.266,70.813
  pour cut-out: 19.284,68.254 19.288,68.254 cw(c19.279,67.506) 20.027,67.496 cw(c19.284,67.496) 19.284,66.753 cw(c19.284,67.498) 18.538,67.498 cw(c19.284,67.508) 19.274,68.254
  pour cut-out: 70.513,22.771 ccw(c70.513,22.367) 70.108,22.367 70.108,22.365 ccw(c70.501,22.366) 70.502,21.973 ccw(c70.508,22.371) 70.907,22.365 70.907,22.378 ccw(c70.513,22.378)
  pour cut-out: 48.329,22.771 ccw(c48.328,22.366) 47.924,22.366 47.924,22.364 ccw(c48.317,22.365) 48.318,21.972 ccw(c48.324,22.37) 48.722,22.364 48.722,22.377 ccw(c48.329,22.377)
  region net NetC3A_2: 93.388,19.046 92.1,19.046 ccw(c92.1,18.753) 91.807,18.753 91.807,14.387 ccw(c92.1,14.386) 92.1,14.094 93.388,14.094 ccw(c93.388,14.387) 93.68,14.387 93.68,18.753 ccw(c93.388,18.753)
  region net NetC3A_1: 95.695,19.046 94.407,19.046 ccw(c94.407,18.753) 94.114,18.753 94.114,11.979 ccw(c94.407,11.979) 94.407,11.686 95.695,11.686 ccw(c95.695,11.979) 95.987,11.979 95.987,18.753 ccw(c95.695,18.753)
  region net NetC3B_2: 71.2,19.046 69.912,19.046 ccw(c69.912,18.753) 69.619,18.753 69.619,14.387 ccw(c69.912,14.386) 69.912,14.094 71.2,14.094 ccw(c71.2,14.387) 71.492,14.387 71.492,18.753 ccw(c71.2,18.753)
  region net NetC3B_1: 73.507,19.046 72.219,19.046 ccw(c72.219,18.753) 71.926,18.753 71.926,11.979 ccw(c72.219,11.979) 72.219,11.686 73.507,11.686 ccw(c73.507,11.979) 73.799,11.979 73.799,18.753 ccw(c73.507,18.753)
  region net NetC23A_2: 76.844,19.046 78.132,19.046 cw(c78.132,18.753) 78.424,18.753 78.424,14.387 cw(c78.132,14.386) 78.132,14.094 76.844,14.094 cw(c76.844,14.387) 76.551,14.387 76.551,18.753 cw(c76.844,18.753)
  region net NetC26A_1: 74.537,19.046 75.825,19.046 cw(c75.825,18.753) 76.117,18.753 76.117,11.979 cw(c75.825,11.979) 75.824,11.686 74.537,11.686 cw(c74.537,11.979) 74.244,11.979 74.244,18.753 cw(c74.537,18.753)
  region net NetC23B_2: 54.652,19.046 55.94,19.046 cw(c55.94,18.753) 56.233,18.753 56.233,14.387 cw(c55.94,14.386) 55.94,14.094 54.652,14.094 cw(c54.652,14.387) 54.36,14.387 54.36,18.753 cw(c54.652,18.753)
  region net NetC26B_1: 52.345,19.046 53.633,19.046 cw(c53.633,18.753) 53.926,18.753 53.926,11.979 cw(c53.633,11.979) 53.633,11.686 52.345,11.686 cw(c52.345,11.979) 52.053,11.979 52.053,18.753 cw(c52.345,18.753)
  region net NetC67_1: 6.664,14.272 9.947,14.272 9.947,11.479 6.664,11.479
  pour cut-out: 78.621,17.884 78.621,19.214 69.438,19.214 69.438,13.166 78.621,13.166
  pour cut-out: 56.429,17.884 56.429,19.214 47.247,19.214 47.247,13.166 56.429,13.166
  pour cut-out: 54.657,13.99 52.992,13.99 52.992,14.4 54.657,14.4
  pour cut-out: 50.037,13.99 48.373,13.99 48.373,14.4 50.037,14.4
  pour cut-out: 52.545,11.583 50.881,11.583 50.881,11.993 52.545,11.993
  pour cut-out: 91.639,19.231 95.062,19.231 95.062,13.261 91.639,13.261
  pour cut-out: 34.23,18.089 34.23,19.24 29.832,19.24 29.832,12.854 34.23,12.854
Bottom Layer:
  region net -12V0: 11.723,35.884 11.732,35.875 cw(c11.442,35.875) 11.442,35.585 10.793,35.585 cw(c10.793,35.875) 10.503,35.875 cw(c10.802,35.875) 10.802,36.174 11.45,36.174 cw(c11.442,35.884) 11.732,35.875
  region net -12VOP: 13.388,14.28 14.001,14.28 cw(c14.001,13.99) 14.291,13.99 14.291,13.359 cw(c14.003,13.359) 14.003,13.07 13.426,13.07 cw(c13.426,13.405) 13.091,13.405 13.091,13.993 cw(c13.378,13.993) 13.378,14.28
  region net +3.3VA: 27.241,22.152 27.854,22.152 cw(c27.854,21.861) 28.145,21.861 28.145,21.23 cw(c27.856,21.23) 27.856,20.942 27.279,20.942 cw(c27.279,21.277) 26.944,21.277 26.944,21.864 cw(c27.232,21.864) 27.232,22.152
  region net +5VA: 27.237,14.296 27.85,14.296 cw(c27.85,14.005) 28.14,14.005 28.14,13.374 cw(c27.851,13.374) 27.851,13.086 27.275,13.086 cw(c27.275,13.421) 26.94,13.421 26.94,14.008 cw(c27.227,14.008) 27.227,14.296
  region net +5VAK: 63.349,74.79 63.658,74.788 cw(c63.658,74.491) 63.955,74.491 63.955,73.31 cw(c63.646,73.31) 63.646,73.001 63.353,73.001 cw(c63.353,73.31) 63.044,73.31 63.044,74.491 cw(c63.341,74.491) 63.341,74.788
  region net -12VOP: 8.823,49.67 cw(c8.619,49.461) 8.828,49.256 8.218,48.646 cw(c8.002,48.855) 7.793,48.639 cw(c8.009,48.855) 7.793,49.071 8.391,49.67 cw(c8.607,49.454)
  region net +12VOP: 6.741,49.457 cw(c6.449,49.454) 6.452,49.161 5.813,49.161 cw(c5.813,49.457) 5.517,49.457 cw(c5.818,49.461) 5.814,49.762 6.436,49.762 cw(c6.436,49.457)
  region net +12VOPF: 4.969,58.547 cw(c4.973,58.254) 5.265,58.257 5.265,57.511 cw(c4.979,57.511) 4.979,57.224 cw(c4.979,57.539) 4.664,57.539 4.664,58.241 cw(c4.969,58.241)
  region net -12VOPF: 10.198,59.082 ccw(c10.198,58.784) 9.9,58.784 9.9,58.776 ccw(c10.198,58.776) 10.198,58.478 11.033,58.478 ccw(c11.033,58.784) 11.339,58.784 ccw(c11.041,58.785) 11.041,59.082
  pour cut-out: 70.173,61.664 ccw(c70.173,61.189) 69.698,61.189 69.698,61.045 cw(c69.289,61.045) 69.289,60.636 ccw(c69.289,60.224) 68.877,60.224 68.877,60.051 ccw(c69.256,60.051) 69.256,59.671 73.031,59.671 ccw(c73.031,60.139) 73.499,60.139 73.499,60.97 ccw(c72.826,60.97) 72.826,61.643
  region net +5VAK: 27.868,55.548 cw(c27.868,55.266) 28.15,55.266 28.15,54.636 cw(c27.866,54.636) 27.866,54.351 27.258,54.351 cw(c27.258,54.664) 26.945,54.664 26.945,55.249 cw(c27.245,55.249) 27.245,55.548
  region net +3.3VD: 47.721,57.742 48.334,57.742 cw(c48.334,57.451) 48.625,57.451 48.625,56.822 cw(c48.335,56.822) 48.335,56.532 47.759,56.532 cw(c47.759,56.867) 47.424,56.867 47.424,57.454 cw(c47.712,57.454) 47.712,57.742
  region net +3.3VD: 92.322,25.79 92.322,26.389 ccw(c92.017,26.389) 92.017,26.694 ccw(c92.017,26.394) 91.717,26.394 91.717,25.799 ccw(c92.015,25.799) 92.015,25.501 92.036,25.501 ccw(c92.036,25.786) 92.32,25.786
  region net +3.3VD: 35.42,51.216 36.033,51.216 cw(c36.033,50.925) 36.323,50.925 36.323,50.296 cw(c36.033,50.296) 36.033,50.006 35.458,50.006 cw(c35.458,50.341) 35.123,50.341 35.123,50.928 cw(c35.41,50.928) 35.41,51.216
  region net +3.3VD: 35.588,29.545 36.201,29.545 cw(c36.201,29.254) 36.492,29.254 36.492,28.625 cw(c36.202,28.625) 36.202,28.335 35.627,28.335 cw(c35.627,28.67) 35.291,28.67 35.291,29.257 cw(c35.579,29.257) 35.579,29.545
  region net NetC23C_2: 32.522,14.701 33.804,14.701 cw(c33.804,14.399) 34.105,14.399 cw(c33.804,14.399) 33.804,14.098 32.539,14.097 cw(c32.539,14.406) 32.23,14.406 32.23,14.409 cw(c32.53,14.4) 32.539,14.701
  region net NetC23C_2: 32.522,19.046 33.804,19.046 cw(c33.804,18.744) 34.105,18.744 cw(c33.804,18.744) 33.804,18.443 32.539,18.442 cw(c32.539,18.751) 32.23,18.751 32.23,18.754 cw(c32.53,18.745) 32.539,19.046
  region net NetC3C_2: 47.723,14.701 49.005,14.701 cw(c49.005,14.399) 49.307,14.399 cw(c49.005,14.399) 49.005,14.098 47.74,14.097 cw(c47.74,14.406) 47.431,14.406 47.431,14.409 cw(c47.732,14.4) 47.74,14.701
  region net NetC3C_2: 47.727,19.046 49.009,19.046 cw(c49.009,18.744) 49.31,18.744 cw(c49.009,18.744) 49.009,18.443 47.744,18.442 cw(c47.744,18.751) 47.435,18.751 47.435,18.754 cw(c47.735,18.745) 47.744,19.046
  region net NetC26C_1: 30.414,12.294 31.064,12.294 cw(c31.064,12) 31.358,12 cw(c31.057,11.992) 31.064,11.691 30.431,11.691 cw(c30.431,12) 30.122,12 30.122,12.002 cw(c30.422,11.994) 30.431,12.294
  region net NetC26C_1: 30.215,14.701 31.497,14.701 cw(c31.497,14.399) 31.798,14.399 cw(c31.497,14.399) 31.497,14.098 30.232,14.097 cw(c30.232,14.406) 29.923,14.406 29.923,14.409 cw(c30.223,14.4) 30.232,14.701
  region net NetC26C_1: 30.215,19.046 31.497,19.046 cw(c31.497,18.744) 31.798,18.744 cw(c31.497,18.744) 31.497,18.443 30.232,18.442 cw(c30.232,18.751) 29.923,18.751 29.923,18.754 cw(c30.223,18.745) 30.232,19.046
  region net NetC3C_1: 50.475,12.294 51.125,12.294 cw(c51.125,12) 51.419,12 cw(c51.118,11.992) 51.125,11.691 50.492,11.691 cw(c50.492,12) 50.183,12 50.183,12.002 cw(c50.483,11.994) 50.492,12.294
  region net NetC3C_1: 50.029,19.046 51.311,19.046 cw(c51.311,18.744) 51.613,18.744 cw(c51.311,18.744) 51.311,18.443 50.046,18.442 cw(c50.046,18.751) 49.737,18.751 49.737,18.754 cw(c50.038,18.745) 50.046,19.046
  region net NetC3C_1: 50.029,14.701 51.311,14.701 cw(c51.311,14.399) 51.613,14.399 cw(c51.311,14.399) 51.311,14.098 50.046,14.097 cw(c50.046,14.406) 49.737,14.406 49.737,14.409 cw(c50.038,14.4) 50.046,14.701
  region net NetC3C_1: 50.029,19.046 51.311,19.046 cw(c51.311,18.744) 51.613,18.744 cw(c51.311,18.744) 51.311,18.443 50.046,18.442 cw(c50.046,18.751) 49.737,18.751 49.737,18.754 cw(c50.038,18.745) 50.046,19.046
  pour cut-out: 64.922,49.101 64.67,49.095 ccw(c64.67,48.268) 64.085,48.853 cw(c63.883,49.054) 63.883,48.769 54.036,48.769 ccw(c54.036,48.263) 53.53,48.263 53.53,48.029 ccw(c54.012,48.029) 54.012,47.547 54.834,47.547 cw(c54.834,47.235) 55.146,47.235 55.146,45.855 ccw(c55.221,45.855) 55.221,45.779 55.992,45.779 ccw(c55.992,45.942) 56.155,45.942 56.155,46.058 cw(c57.284,46.058) 57.284,47.187 cw(c57.732,47.187) 57.732,47.636 64.549,47.636 ccw(c64.549,48.593) 65.506,48.593 ccw(c65.004,48.606) 65.017,49.108 64.971,49.107
  pour cut-out: 55.173,41.131 cw(c53.565,41.131) 54.702,39.994 54.221,39.513 ccw(c55.114,38.62) 53.851,38.62 53.851,34.351 ccw(c54.738,34.351) 54.738,33.464 54.93,33.464 cw(c54.93,30.924) 56.726,32.72 57.584,31.862 ccw(c58.165,32.443) 58.165,31.621 ccw(c58.165,32.209) 58.754,32.209 58.754,32.256 cw(c60.961,32.256) 60.961,34.464 62.553,34.464 ccw(c62.553,35.131) 63.22,35.131 ccw(c61.925,35.131) 62.841,36.046 57.756,41.131
  region net MVCC: 52.109,54.06 52.736,54.061 cw(c52.732,53.76) 53.032,53.756 53.032,53.135 cw(c52.736,53.135) 52.736,52.838 52.109,52.838 cw(c52.109,53.136) 51.811,53.136 51.811,53.762 cw(c52.108,53.762) 52.108,54.059
  region net MVCC: 63.615,54.888 64.265,54.887 cw(c64.265,54.593) 64.559,54.593 cw(c64.258,54.586) 64.265,54.284 63.632,54.284 cw(c63.632,54.593) 63.323,54.593 63.323,54.596 cw(c63.623,54.587) 63.632,54.888
  region net +12VOP: 27.238,6.539 27.851,6.539 cw(c27.851,6.248) 28.141,6.248 28.141,5.617 cw(c27.853,5.617) 27.853,5.329 27.276,5.329 cw(c27.276,5.664) 26.941,5.664 26.941,6.251 cw(c27.228,6.251) 27.228,6.539
  pour cut-out: 19.284,68.261 19.289,68.261 cw(c19.279,67.513) 20.028,67.503 cw(c19.285,67.503) 19.284,66.76 cw(c19.284,67.506) 18.539,67.506 cw(c19.284,67.515) 19.275,68.261
  pour cut-out: 19.284,70.828 19.289,70.828 cw(c19.279,70.08) 20.028,70.07 cw(c19.285,70.07) 19.284,69.327 cw(c19.284,70.073) 18.539,70.073 cw(c19.284,70.082) 19.275,70.828
  pour cut-out: 16.649,70.828 16.654,70.828 cw(c16.644,70.08) 17.393,70.07 cw(c16.65,70.07) 16.649,69.327 cw(c16.649,70.073) 15.904,70.073 cw(c16.649,70.082) 16.64,70.828
  pour cut-out: 16.649,68.261 16.654,68.261 cw(c16.644,67.513) 17.393,67.503 cw(c16.65,67.503) 16.649,66.76 cw(c16.649,67.506) 15.904,67.506 cw(c16.649,67.515) 16.64,68.261
  region net NetC26B_1: 52.342,14.701 53.625,14.701 cw(c53.625,14.399) 53.926,14.399 cw(c53.625,14.399) 53.625,14.098 52.36,14.097 cw(c52.36,14.406) 52.051,14.406 52.051,14.409 cw(c52.351,14.4) 52.36,14.701
  region net NetC23B_2: 54.648,14.701 55.931,14.701 cw(c55.931,14.399) 56.232,14.399 cw(c55.931,14.399) 55.931,14.098 54.666,14.097 cw(c54.666,14.406) 54.357,14.406 54.357,14.409 cw(c54.657,14.4) 54.666,14.701
  region net NetC23B_2: 54.645,19.046 55.927,19.046 cw(c55.927,18.744) 56.228,18.744 cw(c55.927,18.744) 55.927,18.443 54.662,18.442 cw(c54.662,18.751) 54.353,18.751 54.353,18.754 cw(c54.653,18.745) 54.662,19.046
  region net NetC26B_1: 52.342,19.046 53.625,19.046 cw(c53.625,18.744) 53.926,18.744 cw(c53.625,18.744) 53.625,18.443 52.36,18.442 cw(c52.36,18.751) 52.051,18.751 52.051,18.754 cw(c52.351,18.745) 52.36,19.046
  region net NetC3B_2: 69.911,14.701 71.193,14.701 cw(c71.193,14.399) 71.495,14.399 cw(c71.193,14.399) 71.193,14.098 69.928,14.097 cw(c69.928,14.406) 69.619,14.406 69.619,14.409 cw(c69.92,14.4) 69.928,14.701
  region net NetC3B_2: 69.915,19.046 71.197,19.046 cw(c71.197,18.744) 71.498,18.744 cw(c71.197,18.744) 71.197,18.443 69.932,18.442 cw(c69.932,18.751) 69.623,18.751 69.623,18.754 cw(c69.923,18.745) 69.932,19.046
  region net NetC3B_1: 72.217,19.046 73.499,19.046 cw(c73.499,18.744) 73.801,18.744 cw(c73.499,18.744) 73.499,18.443 72.234,18.442 cw(c72.234,18.751) 71.925,18.751 71.925,18.754 cw(c72.226,18.745) 72.234,19.046
  region net NetC3B_1: 72.217,14.701 73.499,14.701 cw(c73.499,14.399) 73.801,14.399 cw(c73.499,14.399) 73.499,14.098 72.234,14.097 cw(c72.234,14.406) 71.925,14.406 71.925,14.409 cw(c72.226,14.4) 72.234,14.701
  region net NetC26A_1: 74.534,14.701 75.816,14.701 cw(c75.816,14.399) 76.117,14.399 cw(c75.816,14.399) 75.816,14.098 74.551,14.097 cw(c74.551,14.406) 74.242,14.406 74.242,14.409 cw(c74.542,14.4) 74.551,14.701
  region net NetC26A_1: 74.534,19.046 75.816,19.046 cw(c75.816,18.744) 76.117,18.744 cw(c75.816,18.744) 75.816,18.443 74.551,18.442 cw(c74.551,18.751) 74.242,18.751 74.242,18.754 cw(c74.542,18.745) 74.551,19.046
  region net NetC23A_2: 76.827,19.046 78.109,19.046 cw(c78.109,18.744) 78.41,18.744 cw(c78.109,18.744) 78.109,18.443 76.844,18.442 cw(c76.844,18.751) 76.535,18.751 76.535,18.754 cw(c76.835,18.745) 76.844,19.046
  region net NetC23A_2: 76.827,14.701 78.109,14.701 cw(c78.109,14.399) 78.41,14.399 cw(c78.109,14.399) 78.109,14.098 76.844,14.097 cw(c76.844,14.406) 76.535,14.406 76.535,14.409 cw(c76.835,14.4) 76.844,14.701
  region net NetC3A_2: 92.103,19.046 93.385,19.046 cw(c93.385,18.744) 93.686,18.744 cw(c93.385,18.744) 93.385,18.443 92.12,18.442 cw(c92.12,18.751) 91.811,18.751 91.811,18.754 cw(c92.111,18.745) 92.12,19.046
  region net NetC3A_1: 94.405,19.046 95.687,19.046 cw(c95.687,18.744) 95.989,18.744 cw(c95.687,18.744) 95.687,18.443 94.422,18.442 cw(c94.422,18.751) 94.113,18.751 94.113,18.754 cw(c94.414,18.745) 94.422,19.046
  region net NetC3A_2: 92.099,14.701 93.381,14.701 cw(c93.381,14.399) 93.683,14.399 cw(c93.381,14.399) 93.381,14.098 92.116,14.097 cw(c92.116,14.406) 91.807,14.406 91.807,14.409 cw(c92.108,14.4) 92.116,14.701
  region net NetC3A_1: 94.405,14.701 95.687,14.701 cw(c95.687,14.399) 95.989,14.399 cw(c95.687,14.399) 95.687,14.098 94.422,14.097 cw(c94.422,14.406) 94.113,14.406 94.113,14.409 cw(c94.414,14.4) 94.422,14.701
  region net NetC3A_1: 94.851,12.294 95.501,12.294 cw(c95.501,12) 95.795,12 cw(c95.494,11.992) 95.501,11.691 94.868,11.691 cw(c94.868,12) 94.559,12 94.559,12.002 cw(c94.859,11.994) 94.868,12.294
  region net NetC26A_1: 74.79,12.294 75.44,12.294 cw(c75.44,12) 75.734,12 cw(c75.433,11.992) 75.44,11.691 74.807,11.691 cw(c74.807,12) 74.498,12 74.498,12.002 cw(c74.799,11.994) 74.807,12.294
  region net NetC3B_1: 72.663,12.294 73.313,12.294 cw(c73.313,12) 73.607,12 cw(c73.306,11.992) 73.313,11.691 72.68,11.691 cw(c72.68,12) 72.371,12 72.371,12.002 cw(c72.671,11.994) 72.68,12.294
  region net NetC26B_1: 52.537,12.294 53.187,12.294 cw(c53.187,12) 53.481,12 cw(c53.18,11.992) 53.187,11.691 52.554,11.691 cw(c52.554,12) 52.245,12 52.245,12.002 cw(c52.545,11.994) 52.554,12.294
  region net NetC67_1: 6.661,13.815 7.089,14.243 9.944,14.243 9.944,11.466 6.661,11.466
  pour cut-out: 68.803,36.886 69.329,36.886 69.329,37.128 68.831,37.052
  pour cut-out: 52.413,44.764 53.524,44.764 53.528,44.76 53.524,44.756 53.524,44.7 52.433,44.7 52.402,44.732
Multi-Layer:
  pour cut-out: 41,93 ccw(c45,93) 45,89 ccw(c45,93) 49,93 ccw(c45,93) 45,97 ccw(c45,93)
  pour cut-out: 92,75 ccw(c96,75) 96,71 ccw(c96,75) 100,75 ccw(c96,75) 96,79 ccw(c96,75)
  pour cut-out: 41,93 ccw(c45,93) 45,89 ccw(c45,93) 49,93 ccw(c45,93) 45,97 ccw(c45,93)
  pour cut-out: 0,4 ccw(c4,4) 4,0 ccw(c4,4) 8,4 ccw(c4,4) 4,8 ccw(c4,4)
  pour cut-out: 92,4 ccw(c96,4) 96,0 ccw(c96,4) 100,4 ccw(c96,4) 96,8 ccw(c96,4)
  pour cut-out: 92,4 ccw(c96,4) 96,0 ccw(c96,4) 100,4 ccw(c96,4) 96,8 ccw(c96,4)

## Silkscreen, mask and mechanical layers (free items; w line width, h text height)
Top Overlay:
  region: 316 vertices and 0 holes, not listed, extent 69.436,77.96 90.438,86.355
  text "LH" at 65.54,88.636 h1.52
  text "LC" at 70.613,88.653 h1.52
  text "RH" at 74.088,88.636 h1.52
  text "RC" at 79.089,88.653 h1.52
  text "LR" at 4.959,86.029 h1.52 r90
  text "LL" at 4.944,81.193 h1.52 r90
  text "'.Product_Name''.Project_ID'.v'.Project_Version'" at 71.629,75.489 h2.5
  text "PHL" at 1.456,68.611 h1.52
  text "PHR" at 1.366,61.619 h1.52
Bottom Overlay:
  text "'.Product_Name''.Project_ID'.v'.Project_Version'" at 57.821,1.566 h2.5
Top Solder:
  lines w1: 6.32,71.682 6.331,65.913 ; 6.326,62.432 6.326,64.294 ; 6.326,73.345 6.326,75.164 ; 28.326,62.432 28.326,62.784 ; 28.326,64.641 28.326,67.338 ; 28.326,69.244 28.326,75.164 ; 28.326,75.164 28.326,75.164
Board:
  the board outline again, w0.02
Title:

## Text inside footprints (layer, text, board x,y; h text height)
C75: Top Assembly "C" at 37.783,50.132 h0.9; Top Assembly "+" at 35.183,51.932 h0.3
C123: Top Assembly "A" at 56.292,57.176 h0.7 r180; Top Assembly "+" at 57.592,56.176 h0.3 r180
C125: Top Assembly "+" at 66.606,54.887 h0.3 r270; Top Assembly "A" at 65.606,53.587 h0.7 r270